# Altium PCB machnguon5V.PcbDoc
Units mil, origin at the board's own origin, x right, y up, seen from the top; angles counter-clockwise.
Board outline 1615.03 x 920.03 mil, 2 copper layers (Top Layer, Bottom Layer); 8 components, 6 nets, 18 pads, 0 vias.
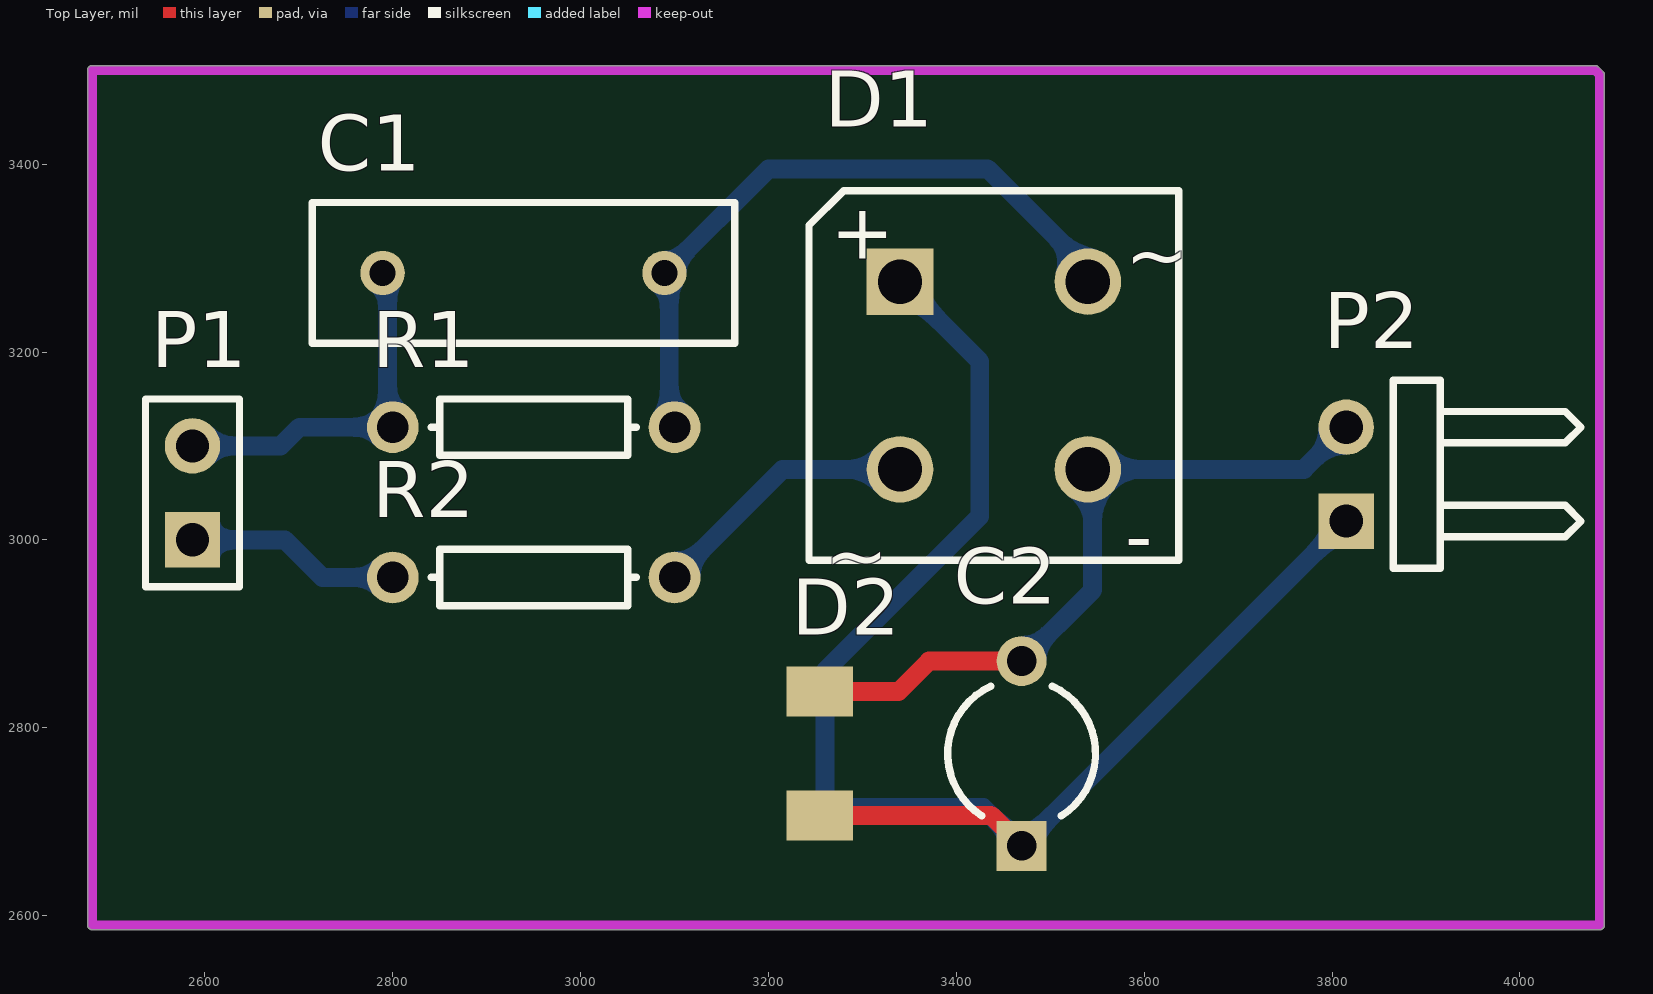
[diagram p0: Top Layer view]
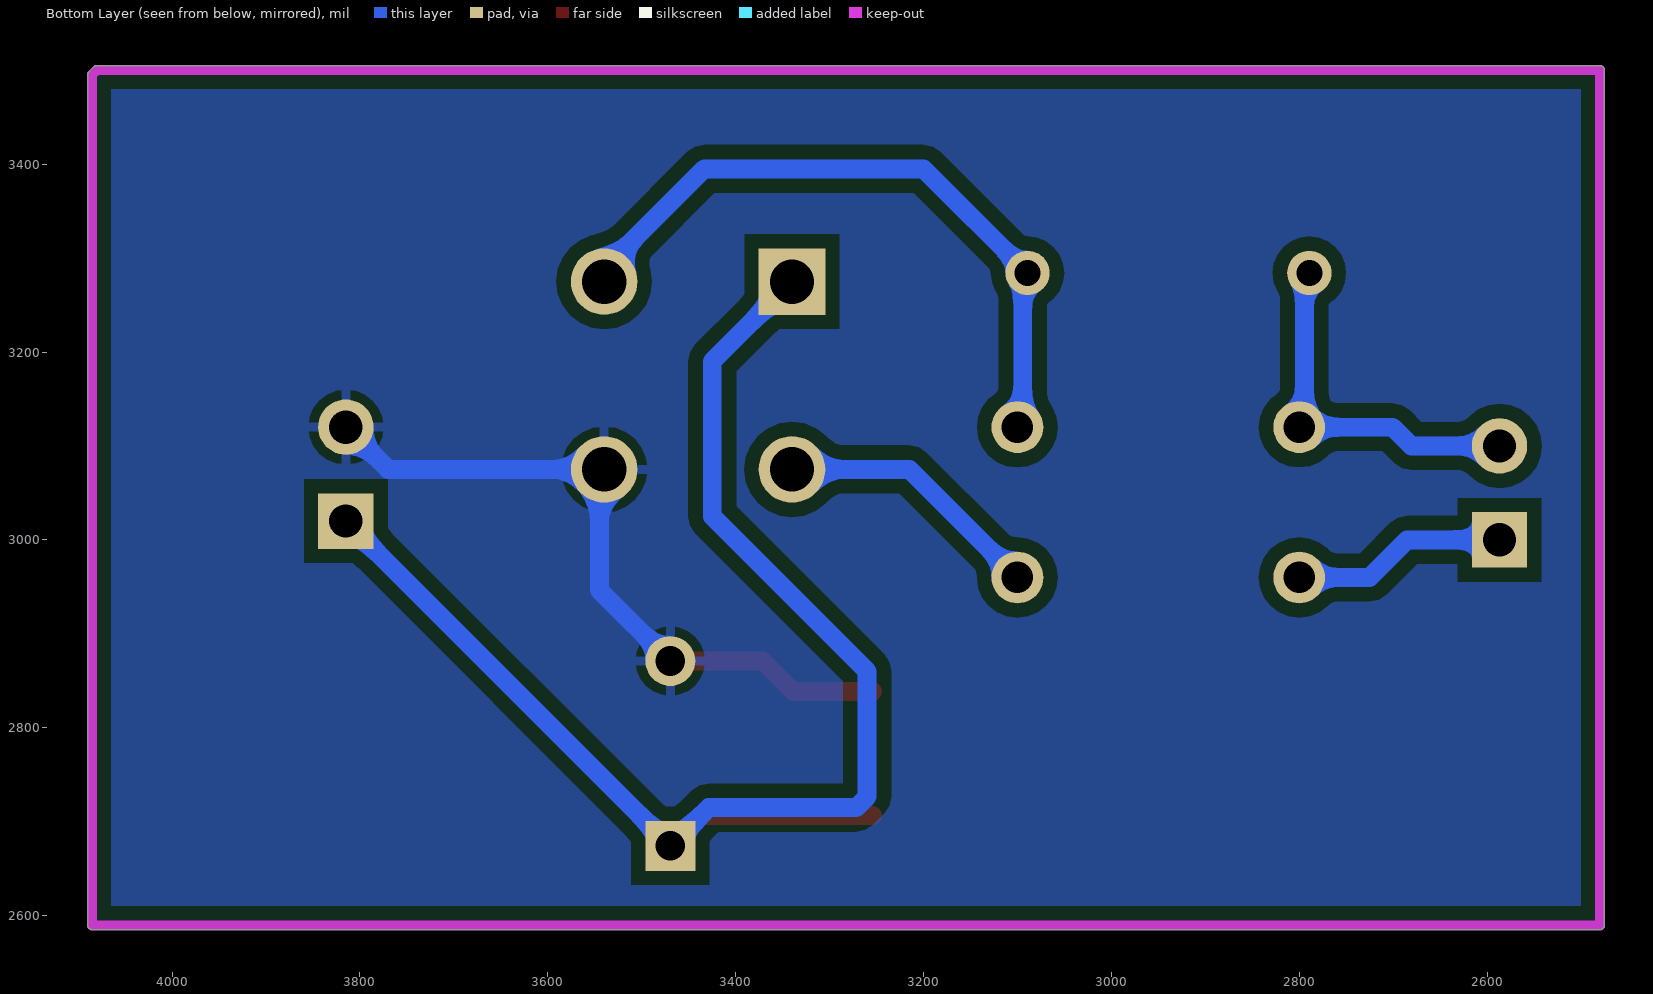
[diagram p1: Bottom Layer view, seen from below]

## Layer stack, top to bottom
Top Solder: solder mask 0.4, Solder Resist, Dk 3.5
Top Layer: signal copper 1.4
Dielectric 1: dielectric 12.6, FR-4, Dk 4.8
Bottom Layer: signal copper 1.4
Bottom Solder: solder mask 0.4, Solder Resist, Dk 3.5

## Board outline
2480,2584.99 cw(c2480,2590) 2474.99,2590 2474.99,3500 cw(c2480,3500) 2480,3505.01 4080,3505.01 cw(c4080,3500) 4083.56,3503.53 4088.55,3498.55 cw(c4085.03,3495.01) 4090.01,3495 4090.01,2590 cw(c4085,2590) 4085,2584.99

## Design rules (kind name [scope] priority, off if disabled: settings)
Clearance [All] p1: gap=15 ignorepadtopadclearanceinfootprint=FALSE
PolygonConnect [All] p1: connectstyle=Relief reliefconductorwidth=10 reliefentries=4 polygonreliefangle="90 Angle" airgapwidth=10
RoomDefinition "mach nguon 5V" [InComponentClass('mach nguon 5V')] p1: confinementstyle=ConfineIn formatcopy=TRUE lockcomponents=FALSE outline 7045,1060 7265,1060 7265,1460 7045,1460
RoutingLayers [All] p1: top layer_v5=FALSE bottom layer_v5=TRUE
RoutingVias [All] p1: holewidth=28 width=50 viastyle="Through Hole" minholewidth=28 minwidth=50 maxholewidth=28 maxwidth=50
SolderMaskExpansion [All] p1: expansion=4 istentingtop=FALSE
Width [All] p1: maxlimit=30 minlimit=10 preferedwidth=20
29 further rules are at their usual default settings.

## Classes and differential pairs
component class "mach nguon 5V": C1 C2 D1 D2 P1 P2 R1

## Components (designator, comment, footprint, x,y, rotation, side; value= is the part's Value field where it differs from the comment)
C1 "Cap" RAD-0.3 2939.21,3284.15 r0 top value=1uF
C2 "Cap2" CAPR5-4X5 3469.5,2772.59 r90 top value=100u
D1 "Bridge1" D-38 3440,3175 r0 top
D2 "5.1V" "DIODE ZENNER SMD SOD80" 3254.39,2772.59 r90 top
P1 "Header 2" HDR1X2 2586.72,3000 r90 top
P2 "Header 2H" HDR1X2H 3815,3020 r90 top
R1 "Res1" AXIAL-0.3 2950,3120 r0 top value=100K
R2 "Res1" AXIAL-0.3 2950,2960 r0 top value=1K

## Footprints (in the part's own frame and the unit in brackets; to place one, negate y for a bottom-side part, rotate by r counter-clockwise, add the part's x,y. Pads: shape width x height; smd on the part's side, far side on the other; paste and mask are expansions set on the pad)
AXIAL-0.3 [mm] "Axial Device, Thru-Hole; 2 Leads; 0.3 in Pin Spacing"
  round 1.4 hole 0.85: 1(-3.81,0) 2(3.81,0)
  silkscreen extent -2.77,-0.76 2.77,0.76
CAPR5-4X5 [mm] "Capacitor; 2 Leads"
  rect 1.35x1.35 hole 0.8: 1(-2.5,0)
  round 1.35 hole 0.8: 2(2.5,0)
  silkscreen extent -1.69,-2 1.82,2
D-38 [mm] "Bridge Rectifier; 4 Terminals; Body 9.4 x 9.4 mm (typ); Pitch 5.08 mm"
  rect 1.8x1.8 hole 1.2: 1(-2.54,2.54)
  round 1.8 hole 1.2: 2(-2.54,-2.54) 3(2.54,-2.54) 4(2.54,2.54)
  silkscreen extent -5,-5 5,5, body extent -5,-5 5,5, height 9.91
"DIODE ZENNER SMD SOD80" [mm] "SOD80"
  rect 1.35x1.8 smd: 1(1.675,0) 2(-1.675,0)
  body extent -1.75,-0.76 1.75,0.74, height 1.45
HDR1X2 [mm] "Connector; Header; 2 Position"
  rect 1.5x1.5 hole 0.9: 1(0,0)
  round 1.5 hole 0.9: 2(2.54,0)
  silkscreen extent -1.27,-1.27 3.81,1.27
HDR1X2H [mm] "Connector; Header; 2 Position; Right Angle"
  rect 1.5x1.5 hole 0.9: 1(0,0)
  round 1.5 hole 0.9: 2(2.54,0)
  silkscreen extent -1.27,-6.35 3.81,-1.27
RAD-0.3 [mm] "Radial Cap, Thru-Hole; 2 Leads; 0.3 in Pin Spacing"
  round 1.2 hole 0.7: 1(-3.81,0) 2(3.81,0)
  silkscreen extent -5.71,-1.91 5.71,1.91

## Part data
C1 C2: "Capacitor", Publisher="Altium Limited"
  C1: LatestRevisionDate=17-Jul-2002, LatestRevisionNote="Re-released for DXP Platform.", PackageDescription="Radial Cap, Thru-Hole; 2 Leads; 0.3 in Pin Spacing", PackageReference=RAD-0.3, Published=8-Jun-2000
  C2: PackageDescription="Capacitor; 2 Leads", PackageReference=CAPR5-4X5, Published=23-Sep-2002
D1: "Full Wave Diode Bridge", DatasheetVersion=E2732B, LatestRevisionDate=29-May-2009, LatestRevisionNote="Sch pins A & K swapped.", PackageDescription="Bridge Rectifier; 4 Terminals; Body 9.4 x 9.4 mm (typ); Pitch 5.08 mm", PackageReference=D-38, Published=8-Jun-2000, Publisher="Altium Limited"
D2: library part "Diode Zener 5.1V", "Dán", Chung_Loai=Dán, Don_Vi=Con, Ma_Hang=MH002881, Ten_Linh_Kien="Diode Zener 1/2W 5.1V SMD1206 ZMM5.1"
P1: "Header, 2-Pin", LatestRevisionDate=17-Jul-2002, LatestRevisionNote="Re-released for DXP Platform.", Publisher="Altium Limited"
P2: "Header, 2-Pin, Right Angle", LatestRevisionDate=17-Jul-2002, LatestRevisionNote="Re-released for DXP Platform.", Publisher="Altium Limited"
R1 R2: "Resistor", LatestRevisionDate=17-Jul-2002, LatestRevisionNote="Re-released for DXP Platform.", PackageDescription="Axial Device, Thru-Hole; 2 Leads; 0.3 in Pin Spacing", PackageReference=AXIAL-0.3, Published=8-Jun-2000, Publisher="Altium Limited"

## Nets (pads, with @x,y where several pads share a name; then routed paths per layer and width w, separated by ;. In a path a pad name is that pad's centre, name@x,y a point inside that pad or via, vN(x,y) a via of type N, cw(c..) or ccw(c..) an arc to the next point about the centre after c; other vN are vias at no path point)
GND: C2.2 D1.3 D2.1 P2.2 | length 752.5
  Top Layer w20: D2.1 3338.54,2838.54 3371.02,2871.02 C2.2
  Bottom Layer w20: C2.2 3545,2946.52 3545,3075 3770,3075 P2.2
NetC1_1: C1.1 P1.2 R1.1 | length 390.2
  Bottom Layer w20: P1.2 2680.53,3100 2700.53,3120 R1.1 2794.42,3125.58 2794.42,3278.94 C1.1
NetC1_2: C1.2 D1.4 R1.2 | length 724.9
  Bottom Layer w20: R1.2 3094.42,3125.58 3094.42,3278.94 C1.2 3200.06,3395 3433.28,3395 3545,3283.28 D1.4@3545,3275
NetC2_1: C2.1 D1.1 D2.2 P2.1 | length 1600.6
  Top Layer w20: D2.2 3437.02,2706.65 C2.1
  Bottom Layer w20: D1.1 3425,3190 3425,3025 3260,2860 3260,2726.72 3271.72,2715 3428.67,2715 C2.1 3795.47,3000.14 3795.47,3000.47 P2.1
NetD1_2: D1.2 R2.2 | length 292.6
  Bottom Layer w20: R2.2 3215,3075 D1.2@3345,3075
NetP1_1: P1.1 R2.1 | length 229.8
  Bottom Layer w20: P1.1 2685,3000 2725,2960 R2.1

## Polygon pours and split planes (outlines as drawn)
GND on Bottom Layer "GND_L02_P000" (solid, remove dead copper, pour order 0): 4085,2590 4085,3500 2480,3500 2480,2590

## Keep-outs
Keep-Out Layer:
  lines w10: 2480,2590 2480,3500 2505,3500 2515,3500 4080,3500 4085,3495 4085,2785 4085,2590 2480,2590

## Text inside footprints (layer, text, board x,y; h text height)
D1: Top Overlay "~" at 3580,3275 h59.05; Top Overlay "~" at 3260,2955 h59.05; Top Overlay "-" at 3580,2975 h59.05; Top Overlay "+" at 3266.38,3299.57 h59.06